# Altium PCB TTFT.PcbDoc
Units mil, origin at the board's own origin, x right, y up, seen from the top; angles counter-clockwise.
Board outline 667.91 x 620 mil, 4 copper layers (Top Layer, GND, VCC, Bottom Layer), stack 30.634 mil thick; 23 components, 29 nets, 129 pads, 23 vias.
Unrouted connection lines stored in the file: 1.
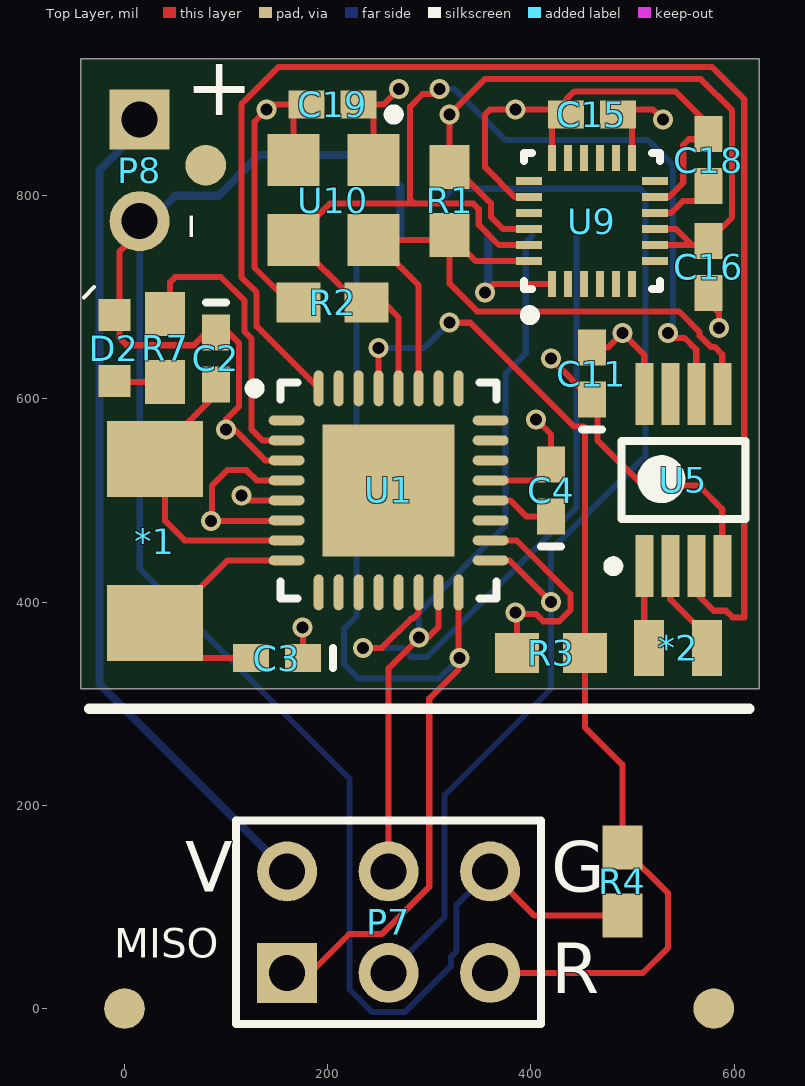
[diagram p0: Top Layer view]
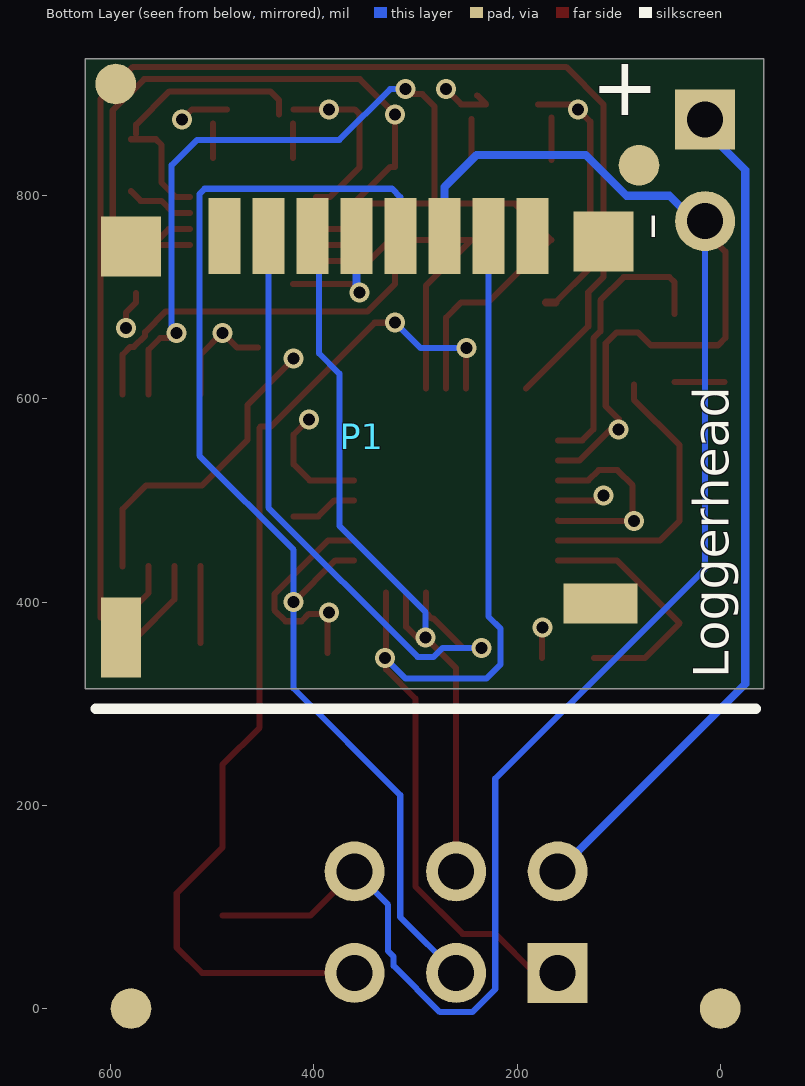
[diagram p1: Bottom Layer view, seen from below]
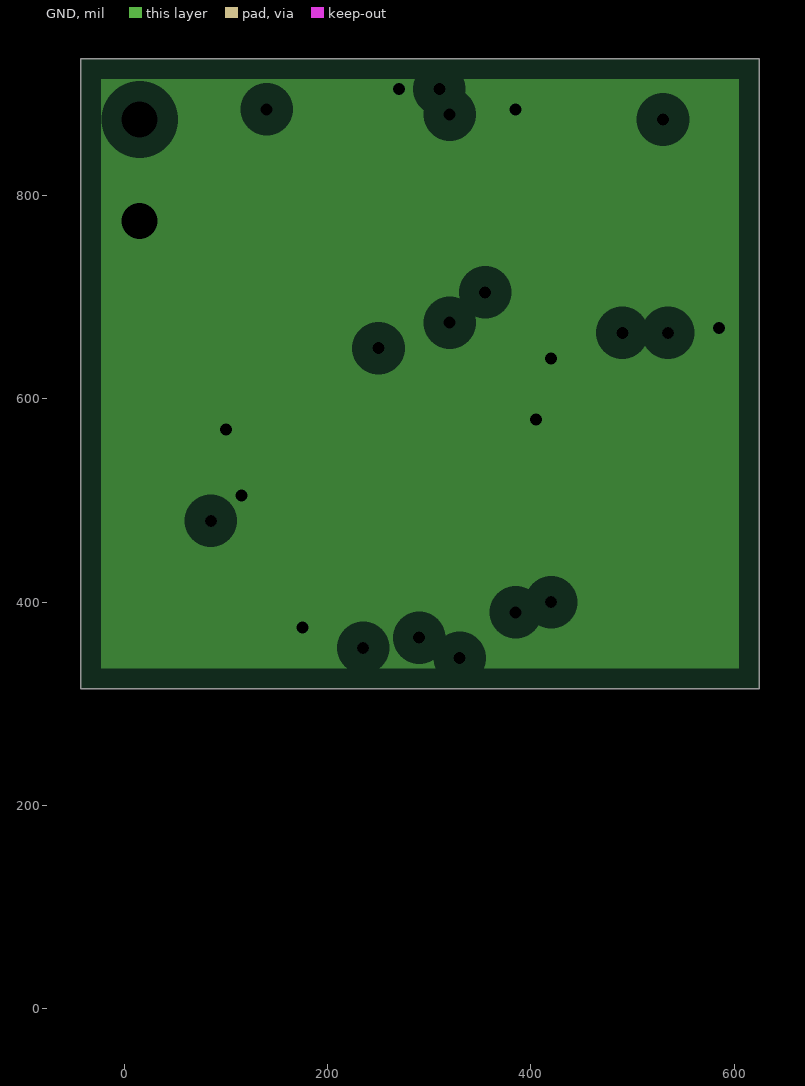
[diagram p2: GND, clearances drawn from the general rule]
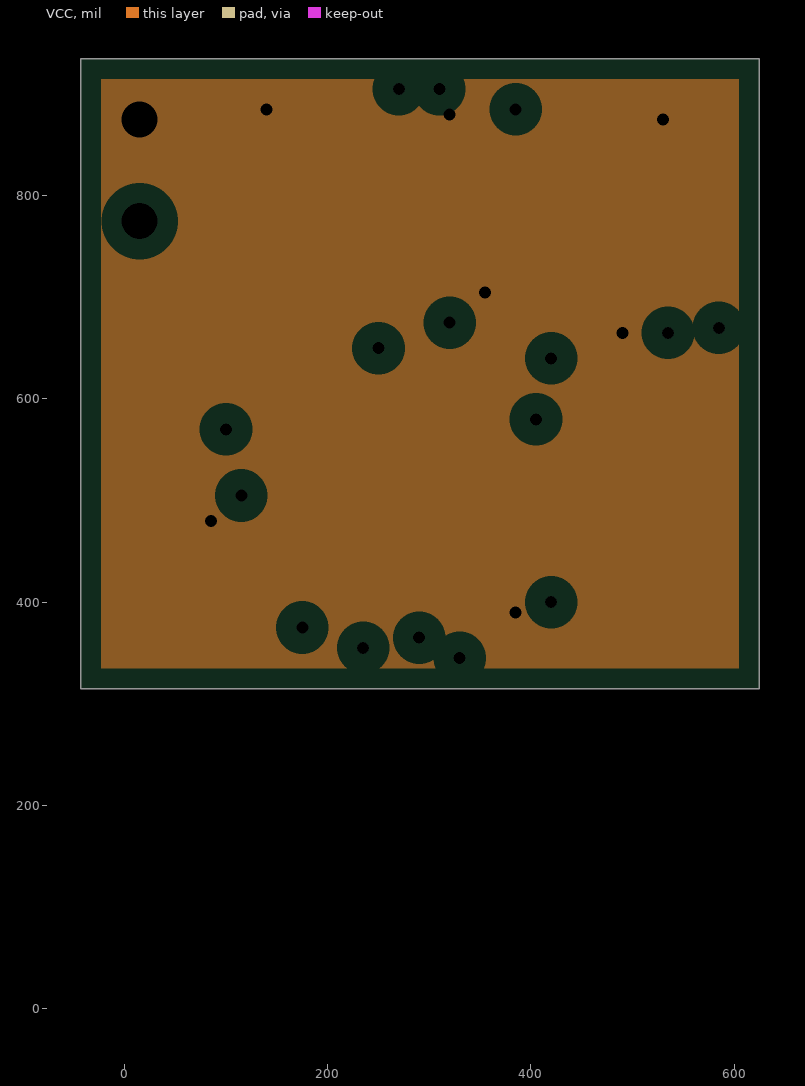
[diagram p3: VCC, clearances drawn from the general rule]

## Layer stack, top to bottom
Top Solder: solder mask 0.4, Solder Resist, Dk 3.5
Top Layer: signal copper 1.4
Dielectric 1: core 10, FR-4, Dk 4.2
GND: plane copper 1.417, net GND
Dielectric 3: prepreg 5, Dk 4.2
VCC: plane copper 1.417, net VCC
Dielectric 2: core 10, Dk 4.2
Bottom Layer: signal copper 1.4
Bottom Solder: solder mask 0.4, Solder Resist, Dk 3.5

## Board outline
-42.91,314.72 -42.91,934.72 625,934.72 625,314.72

## Design rules (kind name [scope] priority, off if disabled: settings)
Clearance [All] p1: gap=6
PlaneClearance [All] p1: clearance=20
PlaneConnect [All] p1: planeconnectstyle=Relief reliefexpansion=20 reliefentries=4 reliefconductorwidth=10 reliefairgap=10
PolygonConnect [All] p1: connectstyle=Relief reliefconductorwidth=10 reliefentries=4 polygonreliefangle="90 Angle" airgapwidth=10
RoutingVias [All] p1: holewidth=11.81 width=19.68 viastyle="Through Hole" minholewidth=11.81 minwidth=19.68 maxholewidth=28 maxwidth=50
SolderMaskExpansion [All] p1: expansion=4
Width [All] p1: maxlimit=10 minlimit=6 preferedwidth=6
27 further rules are at their usual default settings.

## Components (designator, comment, footprint, x,y, rotation, side; value= is the part's Value field where it differs from the comment)
*1 "8MHz" XTAL-ABM3 30,460 r270 top
*2 "32.768kHz" XTAL-ABS06 545,355 r180 top
C2 "100pF" 0402 90,640 r270 top
C3 "100pF" 0402 150,345 r180 top
C4 "0.1uF" 0402 420,510 r90 top
C11 "10nF" 0402 460,625 r90 top
C15 "0.1uF" 0402 460,880 r180 top
C16 "10nF" 0402 575,730 r270 top
C18 "0.1uF" 0402 575,835 r270 top
C19 "0.1uF" 0402 205,890 r180 top
D2 "LED_0603" Diode0603 -10,650 r90 top
P1 "microSD Hirose" "DM3D microSD" 425,635 r270 bottom
P7 "AVR SPI" HDR2X3 160,35 r0 top
P8 "Header 2" HDR1X2 15,875 r270 top
R1 "4.7k" 3-0603 320,795 r90 top
R2 "4.7k" 3-0603 205,695 r180 top
R3 "10k" 3-0603 420,350 r180 top
R4 "omit" 3-0603 490,125 r270 top
R7 "330" 3-0603 40,650 r270 top
U1 "ATmega8-16AC" 32M1-A_M 260,510 r0 top
U5 "DS1342U" uSOP8 550,520 r90 top
U9 "MPU9250" MPU6500 460,775 r90 top
U10 "MS5837" MS5837 245,835 r270 top

## Footprints (in the part's own frame and the unit in brackets; to place one, negate y for a bottom-side part, rotate by r counter-clockwise, add the part's x,y. Pads: shape width x height; smd on the part's side, far side on the other; paste and mask are expansions set on the pad)
3-0603 [mm] "Chip Resistor; Body 1.6 x 0.9 mm (LxW typ)"
  rect 1.1x1 smd: 1(-0.85,0) 2(0.85,0)
32M1-A_M [mm] "QFN, 32-Leads, Body 5x5mm, Pitch 0.5mm, Thermal Pad 3.3x3.3mm, IPC Low Density"
  oval 0.9x0.25 smd: 1(-2.55,1.75) 2(-2.55,1.25) 3(-2.55,0.75) 4(-2.55,0.25) 5(-2.55,-0.25) 6(-2.55,-0.75) 7(-2.55,-1.25) 8(-2.55,-1.75) 17(2.55,-1.75) 18(2.55,-1.25) 19(2.55,-0.75) 20(2.55,-0.25) 21(2.55,0.25) 22(2.55,0.75) 23(2.55,1.25) 24(2.55,1.75)
  oval 0.25x0.9 smd: 9(-1.75,-2.55) 10(-1.25,-2.55) 11(-0.75,-2.55) 12(-0.25,-2.55) 13(0.25,-2.55) 14(0.75,-2.55) 15(1.25,-2.55) 16(1.75,-2.55) 25(1.75,2.55) 26(1.25,2.55) 27(0.75,2.55) 28(0.25,2.55) 29(-0.25,2.55) 30(-0.75,2.55) 31(-1.25,2.55) 32(-1.75,2.55)
  rect 3.3x3.3 smd paste-1.27: 33(0,0)
  silkscreen extent -3.47,-2.7 2.7,2.7, body extent -2.55,-2.55 2.55,2.55, height 1
0402 [mm] "Chip Capacitor; Body 1.0 x 0.5 mm (LxW typ)"
  rect 0.9x0.7 smd: 1(-0.65,0) 2(0.65,0)
  silkscreen extent -1.4,-0.25 -1.4,0.25
Diode0603 [mm]
  rect 0.8x0.8 smd: A(-0.825,0) K(0.825,0)
  silkscreen extent 1.27,0.51 1.53,0.76
"DM3D microSD" [mm] "MICROSD_HIROSE Push-Pull"
  rect 1.5x1.5 smd: 0(-3.048,7.874) 0(-2.921,-3.937)
  rect 1x1.85 smd: 0(6,7.8)
  rect 2x1 smd: 0(6.85,-4.191)
  rect 1.9x0.8 smd: 1(-3.188,-1.601) 2(-3.188,-0.501) 3(-3.188,0.599) 4(-3.188,1.699) 5(-3.188,2.799) 6(-3.188,3.899) 7(-3.188,4.999) 8(-3.188,6.099)
  body extent -3.65,-4.45 7.8,7.5, height 1.55
HDR1X2 [mm] "Connector; Header; 2 Position"
  rect 1.5x1.5 hole 0.9: 1(0,0)
  round 1.5 hole 0.9: 2(2.54,0)
HDR2X3 [mm] "Connector; Header; 3x2 Position"
  rect 1.5x1.5 hole 0.9: 1(0,0)
  round 1.5 hole 0.9: 2(0,2.54) 3(2.54,0) 4(2.54,2.54) 5(5.08,0) 6(5.08,2.54)
  silkscreen extent -1.27,-1.27 6.35,3.81
MPU6500 [mm] "QFN, 24-Leads, Body 3.00x3.00mm, Pitch 0.40mm, Thermal Pad 1.54x1.54mm, IPC Medium Density"
  rect 0.65x0.2 smd: 1(-1.575,1) 2(-1.575,0.6) 3(-1.575,0.2) 4(-1.575,-0.2) 5(-1.575,-0.6) 6(-1.575,-1) 13(1.575,-1) 14(1.575,-0.6) 15(1.575,-0.2) 16(1.575,0.2) 17(1.575,0.6) 18(1.575,1)
  rect 0.2x0.65 smd: 7(-1,-1.575) 8(-0.6,-1.575) 9(-0.2,-1.575) 10(0.2,-1.575) 11(0.6,-1.575) 12(1,-1.575) 19(1,1.575) 20(0.6,1.575) 21(0.2,1.575) 22(-0.2,1.575) 23(-0.6,1.575) 24(-1,1.575)
  silkscreen extent -2.47,-1.7 1.7,1.7, body extent -1.85,-1.25 1.25,1.85, height 0.9
MS5837 [mm]
  rect 1.3x1.3 smd: 1(0,0) 2(0,-2) 3(2,-2) 4(2,0)
  silkscreen extent -1.27,0.38 -1.02,0.63
uSOP8 [mm] "Maxim"
  rect 1.55x0.45 smd: 1(-2.15,0.975) 2(-2.15,0.325) 3(-2.15,-0.325) 4(-2.15,-0.975) 5(2.15,-0.975) 6(2.15,-0.325) 7(2.15,0.325) 8(2.15,0.975)
  silkscreen extent -2.27,-1.55 0.98,1.87, body extent -1.45,-1.55 1.45,1.55, height 1.1
XTAL-ABM3 [mm]
  rect 1.9x2.4 smd: 1(-2.05,0) 2(2.05,0)
  body extent -2.5,-1.6 2.5,1.6, height 1.3
XTAL-ABS06 [mm]
  rect 0.75x1.4 smd: 1(-0.725,0) 2(0.725,0)

## Part data
*1: library part XTAL-ABM3
*2: library part XTAL_ABS06
C2 C3 C4 C11 C15 C16 C18 C19: library part C0402, "Ceramic Chip Capacitor - Standard"
P7: library part "Header 3X2", "Header, 3-Pin, Dual row"
P8: "Header, 2-Pin"
R1 R2 R3 R4 R7: library part ERJ3RK, "Precision Thick Film Chip Resistor, 10 Ohm to 1M Ohm Range, 1% and 0.5% Tolerance, 0603 Size, 0.063 W"
U1: "8-Bit AVR Microcontroller with 8K Bytes of In-System Programmable Flash Memory"
U5: library part DS1337
U9: library part MPU-9250, "Invensense"
U10: "Pressure/Temp"

## Free pads (board coordinates)
  round 40 smd paste-20 mask+5: 0(0,0) 0(80,830) 0(580,0)
  round 40 smd far side paste-20 mask+5: 0(0,0) 0(80,830) 0(580,0) 0(595,910)
  round 40 on Top Overlay paste-20 mask+5: 0(595,910)

## Via types
v1: diameter 19.68, hole 11.81, Top Layer to Bottom Layer, 23 vias

## Nets (pads, with @x,y where several pads share a name; then routed paths per layer and width w, separated by ;. In a path a pad name is that pad's centre, name@x,y a point inside that pad or via, vN(x,y) a via of type N, cw(c..) or ccw(c..) an arc to the next point about the centre after c; other vN are vias at no path point)
BATV: U1.22
BURN: U1.12
CAMRST: U1.9
CS: P1.2 U1.14 | length 630.6
  Top Layer w6: v1(235,355) 253.35,355 282.2,383.84 283.84,383.84 289.53,389.53 U1.14
  Bottom Layer w6: v1(235,355) 273.35,355 282.2,346.16 297.8,346.16 444.72,493.08 P1.2
EN: U1.10
GND: C2.1 C3.1 C4.2 C11.1 C15.2 C16.2 C18.1 C19.1 D2.K P1.6 P7.6 P8.2 R4.2 U1.3 U1.5 U1.21 U5.4 U9.11 U9.18 U9.20 U10.1 | length 3101.3
  Top Layer w6: P8.2@15,765 -5,745 -5,660 2.19,652.81 68.41,652.81 81.19,665.59 C2.1 101.96,665.59 112.78,654.78 112.78,592.96 100,580.18 v1(100,570) 108.03,570 138.5,539.53 U1.3 ; v1(115,505) 119.84,500.16 U1.5 ; C3.1 v1@175.59,374.41 ; C19.1@239.43,898.84 C19.1 255,890 v1(270,905) ; U10.1 245,875.59 ; P7.6 403.46,91.54 R4.2 ; U1.21 404.25,519.84 C4.2 420,565 v1(405,580) ; U9.20 384.28,798.62 355,827.9 355,880 360,885 C15.2@420,885 ; v1(420,640) 420,639.41 C11.1 465.46,593.95 465.46,559.54 510,515 565,515 588.39,491.61 U5.4 ; U9.18 C15.2@420.63,871.22 ; C15.2 434.41,894.41 442.78,902.78 542.22,902.78 575,870 C18.1 ; U9.11 535.72,798.62 550,812.9 550,850 555.59,855.59 C18.1@580,855.59 ; C16.2 575,695 585,685 v1(585,670)
  Bottom Layer w6: P8.2@15,765 15,432.86 221.47,226.39 221.47,19.04 244.04,-3.53 275.96,-3.53 321.47,41.99 321.47,50.96 327,56.49 327,102 P7.6
  Bottom Layer w8: P8.2@15,765 50,800 92.43,800 132.43,840 240,840 271.5,808.5 P1.6
  other v1: 175,375 385,885
HALL: U1.1
IMU_INT: U1.24 U9.12
INTA: U1.32 U5.3 | length 1428.1
  Top Layer w6: U1.32 130,671.5 130,705 115,720 115,890 151.78,926.78 578.22,926.78 610,895 610,385 598.6,385 592.04,391.56 580.08,391.56 562.8,408.85 U5.3
LED1: R7.1 U1.2 | length 285.1
  Top Layer w6: R7.1@45,683.46 45,715 50,720 95,720 118,697 118,666.53 125,659.53 125,570 135.79,559.21 U1.2
LED2: U1.26
MISO: P1.7 P7.1 U1.16 | length 1031.3
  Top Layer w6: P7.1 182.94,35 221.47,73.53 253.53,73.53 300,120 300,305 328.9,333.9 U1.16
  Bottom Layer w6: P1.7 228.19,385.87 216.16,373.84 216.16,338.84 230,325 310,325 v1(330,345)
MOSI: P1.3 P7.4 U1.15 | length 741.6
  Top Layer w6: P7.4 260,335 v1(290,365) 298.42,365 309.21,375.79 U1.15
  Bottom Layer w6: v1(290,365) 290,390 375,475 375,625 395,645 395,754.09 P1.3
Net*1_1: *1.1 C2.2 U1.7 | length 280.6
  Top Layer w6: C2.2@85,614.41 85,599.41 40,554.41 40,540.71 40,480 59.21,460.79 U1.7
Net*1_2: *1.2 C3.2 U1.8 | length 243.8
  Top Layer w6: C3.2 74.29,345 40,379.29 101.81,441.1 U1.8
Net*2_1: *2.1 U5.2 | length 95.4
  Top Layer w6: U5.2 537.2,402.8 573.54,366.46 *2.1
Net*2_2: *2.2 U5.1 | length 75.5
  Top Layer w6: *2.2@511.61,359.84 U5.1
NetC4_1: C4.1 U1.20 | length 66.1
  Top Layer w6: U1.20 379.84,500.16 395.59,484.41 C4.1
NetC18_2: C18.2 U9.10 | length 66.9
  Top Layer w6: U9.10 537.87,782.87 550,795 570.59,795 C18.2@580,804.41
NetD2_A: D2.A R7.2 | length 49
  Top Layer w6: D2.A@-4.02,616.54 R7.2@45,616.54
RESET: P7.5 R3.1 R4.1 U1.29 | length 1026.8
  Top Layer w6: U1.29 v1@250.16,649.84 ; v1(320,675) 340.19,675 442.49,572.69 452.31,572.69 453.46,571.54 R3.1 453.46,276.54 490,240 R4.1 535,113.46 535,60 510,35 P7.5
  Bottom Layer w6: v1(250,650) 295,650 v1(320,675)
RXD: U1.30
SCK: P1.5 P7.3 U1.17 | length 1189.7
  Top Layer w6: U1.17 378.9,441.1 v1(420,400)
  Bottom Layer w6: P7.3 315,90 315,210 420,315 v1(420,400) 420,451.38 512.78,544.16 512.78,801.64 507.51,806.91 323.09,806.91 314.8,798.63 P1.5
SCL: R2.1 U1.28 U5.6 U9.23 U10.3 | length 1127.4
  Top Layer w6: U1.28 269.84,680.16 255,695 228.46,695 167.2,756.26 U10.3 202.19,792.19 285,792.19 ; v1(310,905) 305,900 293.35,900 281.16,887.8 281.16,796.03 285,792.19 ; U9.23 368.62,751.38 348.68,771.32 348.68,786.92 343.41,792.19 285,792.19 ; v1(535,665) 540,660 551.38,660 562.8,648.59 U5.6
  Bottom Layer w6: v1(310,905) 325,905 375,855 515,855 540,830 540,660 v1(535,665)
SDA: R1.1 U1.27 U5.5 U9.24 U10.4 | length 699.3
  Top Layer w6: U1.27 289.53,711.73 U10.4 R1.1@304.72,756.26 ; U9.24 345.91,735.63 R1.1 320,713.35 347.2,686.16 545.81,686.16 566.16,665.81 566.16,662.2 577.2,651.16 580.81,651.16 588.39,643.58 U5.5
STOP: U1.25
TXD: U1.31
VCC: C11.2 C15.1 C16.1 C19.2 P1.4 P7.2 P8.1 R1.2 R2.2 R3.2 U1.4 U1.6 U1.18 U5.8 U9.1 U9.8 U9.9 U9.13 U9.22 U10.2 | length 2545.9
  Top Layer w6: v1(140,885) 128,873 128,729.2 R2.2@162.2,695 ; v1@145,890 C19.2 ; U1.6 159.13,480 v1(85,480) 86.24,481.24 86.24,515 101.24,530 119.84,530 130,519.84 U1.4 ; U10.2 C19.2@166.26,876.85 ; v1(355,705) 362.99,712.99 U9.1 ; U1.18 385.86,460.79 438.84,407.8 438.84,392.2 427.8,381.16 412.2,381.16 404.89,388.46 386.54,388.46 R3.2 ; U9.22 372.87,767.13 360.68,779.32 360.68,792.57 324.79,828.46 R1.2 320,860 v1(320,880) 354.78,914.78 567.19,914.78 598,883.97 598,778.59 C16.1 ; C11.2@455,650.59 475.59,650.59 v1(490,665) 511.61,643.39 U5.8 ; C15.1@485.59,885 520,885 v1(530,875) ; U9.13 C15.1@499.37,871.22 ; U9.8 558.62,751.38 ; U9.9 542.87,767.13 558.62,751.38 ; C16.1@574.21,751.38 558.62,751.38
  Top Layer w8: R2.2@162.2,695 R2.2
  Bottom Layer w6: v1(355,705) v1@358.11,708.11
  Bottom Layer w8: P8.1@15,865 -24.53,825.47 -24.53,319.53 P7.2 ; v1@358.11,708.11 P1.4
  other v1: 385,390
VHF: U1.13
pads on no net: P1.0 P1.1 P1.8 U1.11 U1.19 U1.23 U1.33 U5.7 U9.2 U9.3 U9.4 U9.5 U9.6 U9.7 U9.14 U9.15 U9.16 U9.17 U9.19 U9.21

## Polygon pours and split planes (outlines as drawn)
GND on GND (split plane): 604.9,334.82 -22.81,334.82 -22.81,914.62 604.9,914.62
VCC on VCC (split plane): 604.9,334.82 -22.81,334.82 -22.81,914.62 604.9,914.62

## Silkscreen, mask and mechanical layers (free items; w line width, h text height)
Top Overlay:
  lines w10: -35,295 615,295
  text "+" at 60,860 h100
  text "-" at 105,755 h100 r90
Bottom Overlay:
  lines w10: -35,295 615,295
  text "+" at 60,860 h100
  text "-" at 105,755 h100 r90
  text "Loggerhead" at -20,325 h60 r270
Mechanical 1:
  lines w10: -42.91,-45 625,-45 625,934.72 -42.91,934.72 -42.91,-45

## Text inside footprints (layer, text, board x,y; h text height)
P7: Top Overlay "MISO" at -10,40 h50; Top Overlay "V" at 60,115 h50; Top Overlay "R" at 420,15 h50; Top Overlay "G" at 420,115 h50